# Altium PCB Tigershark 3D R1.8.PcbDoc (part 2 of 3)
Units mil, origin at the board's own origin, x right, y up, seen from the top; angles counter-clockwise.
Board outline 4755 x 4000 mil, 4 copper layers (Top Layer, Groun Plane, Power Plane, Bottom Layer), stack 61.73 mil thick; 343 components, 234 nets, 1061 pads, 540 vias.
Unrouted connection lines stored in the file: 312.
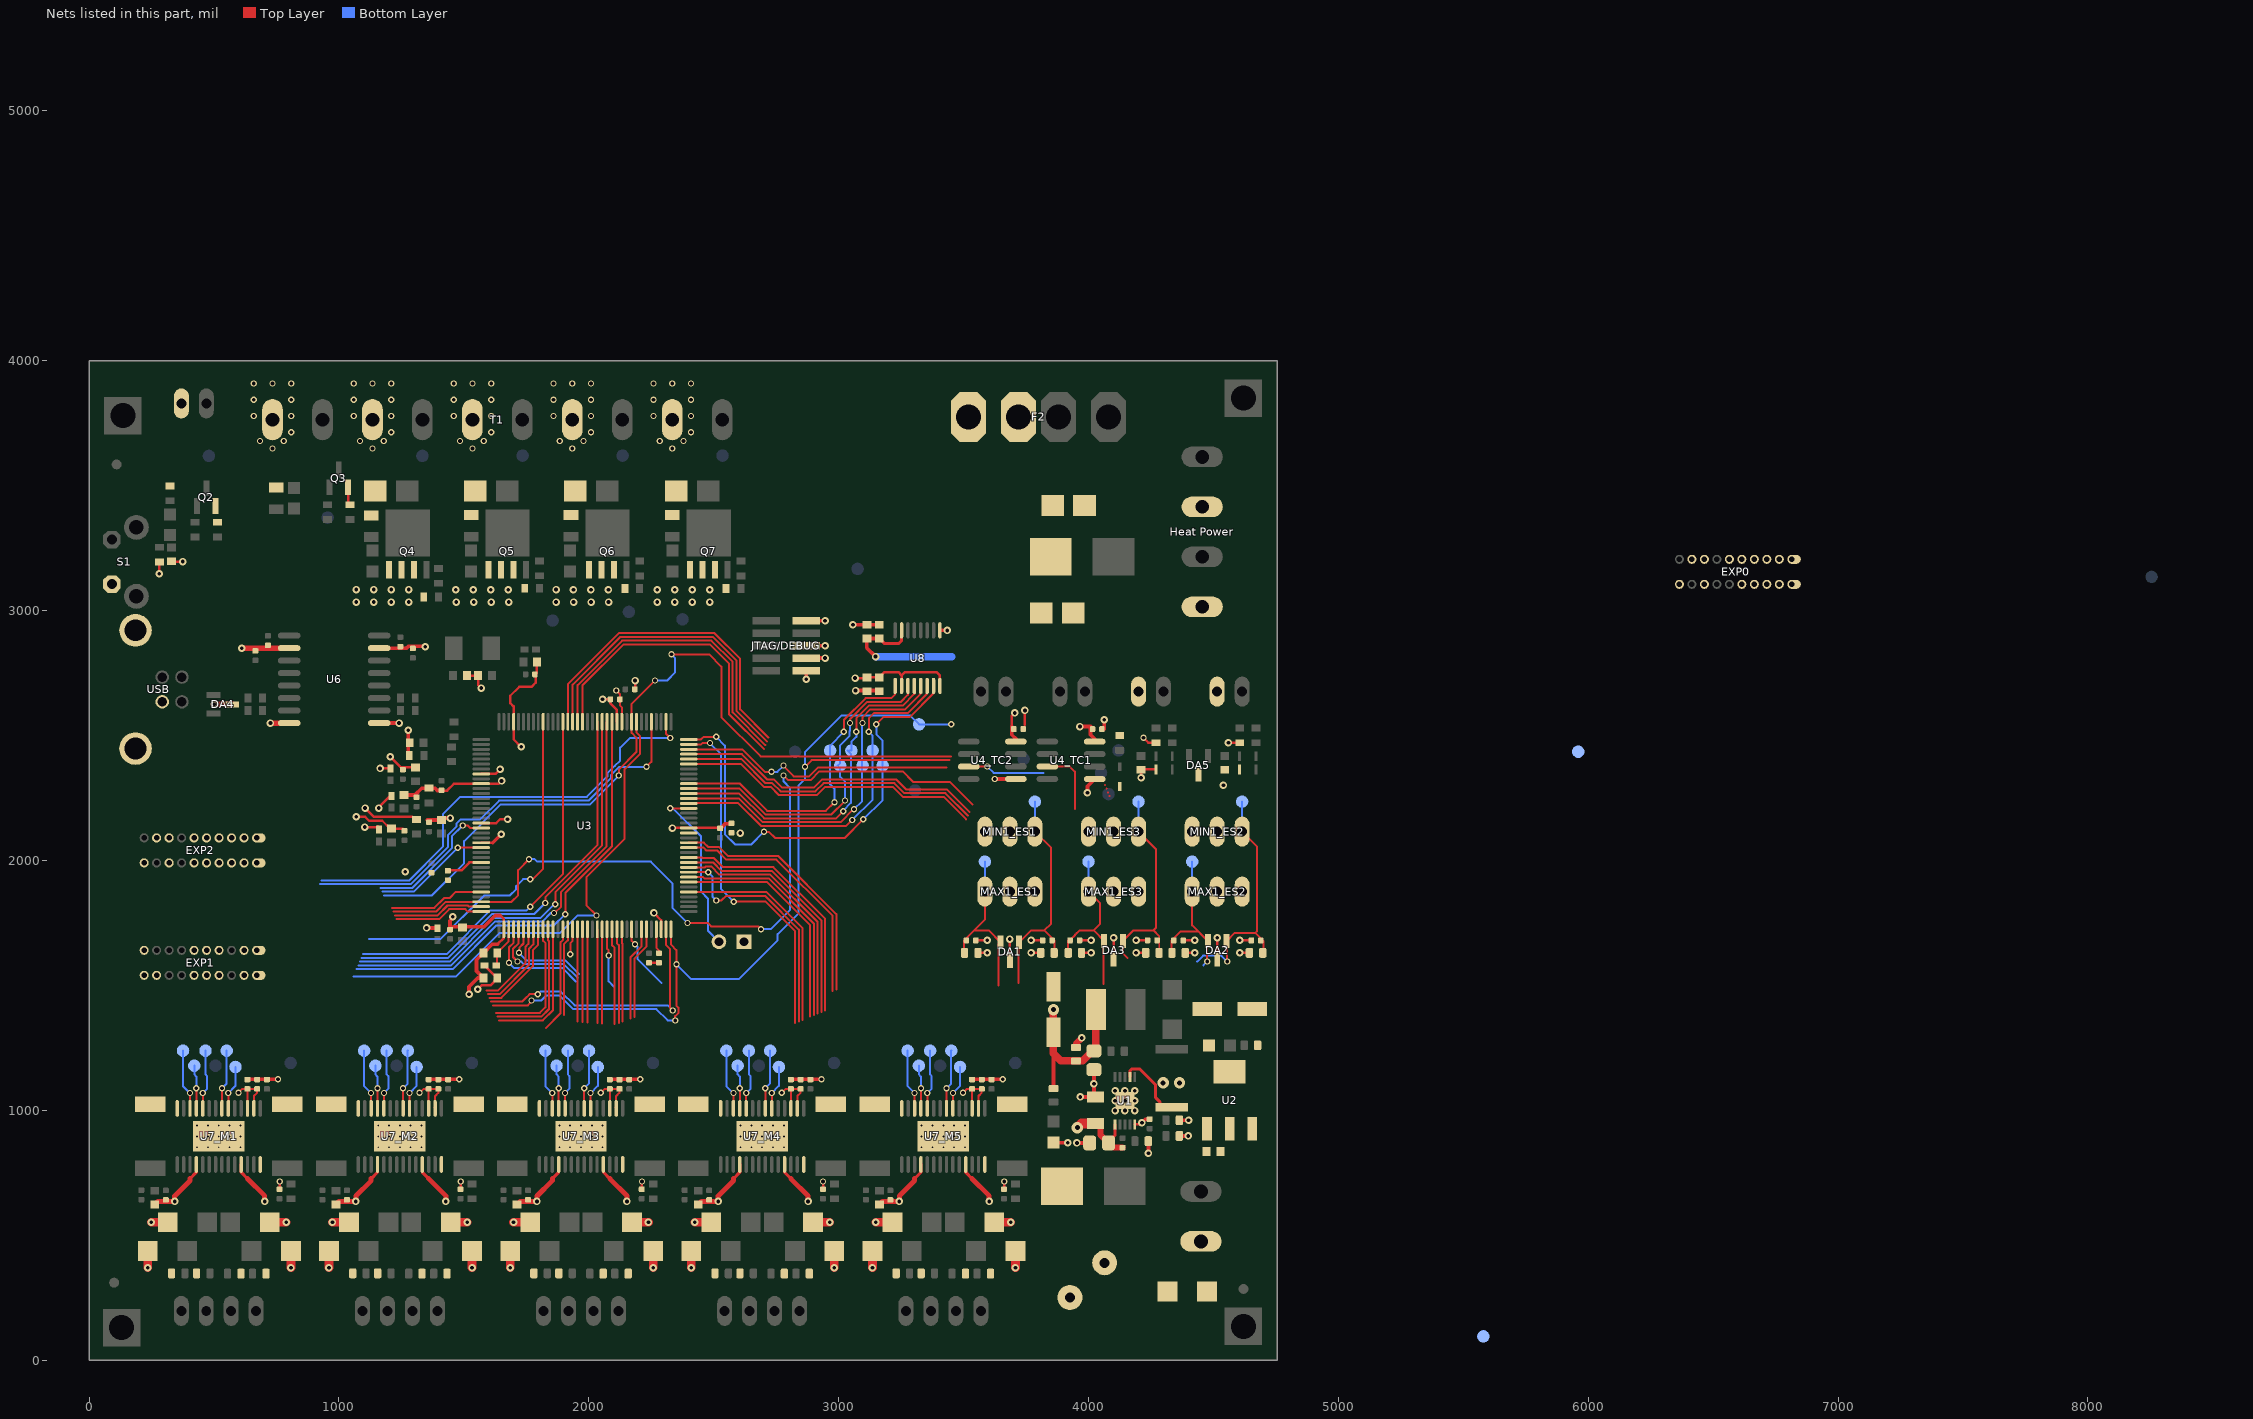
[diagram p4: the nets of this part, all layers, seen from the top]

## Footprints (in the part's own frame and the unit in brackets; to place one, negate y for a bottom-side part, rotate by r counter-clockwise, add the part's x,y. Pads: shape width x height; smd on the part's side, far side on the other; paste and mask are expansions set on the pad) (continued)
LQFP144_N [mm] "Thin QFP, 144-Leads, Body 20x20mm, Pitch 0.5mm, IPC Medium Density"
  oval 1.8x0.3 smd: 1(-10.55,8.75) 2(-10.55,8.25) 3(-10.55,7.75) 4(-10.55,7.25) 5(-10.55,6.75) 6(-10.55,6.25) 7(-10.55,5.75) 8(-10.55,5.25) 9(-10.55,4.75) 10(-10.55,4.25) 11(-10.55,3.75) 12(-10.55,3.25) 13(-10.55,2.75) 14(-10.55,2.25) 15(-10.55,1.75) 16(-10.55,1.25) 17(-10.55,0.75) 18(-10.55,0.25) 19(-10.55,-0.25) 20(-10.55,-0.75) 21(-10.55,-1.25) 22(-10.55,-1.75) 23(-10.55,-2.25) 24(-10.55,-2.75) 25(-10.55,-3.25) 26(-10.55,-3.75) 27(-10.55,-4.25) 28(-10.55,-4.75) 29(-10.55,-5.25) 30(-10.55,-5.75) 31(-10.55,-6.25) 32(-10.55,-6.75) 33(-10.55,-7.25) 34(-10.55,-7.75) 35(-10.55,-8.25) 36(-10.55,-8.75) 73(10.55,-8.75) 74(10.55,-8.25) 75(10.55,-7.75) 76(10.55,-7.25) 77(10.55,-6.75) 78(10.55,-6.25) 79(10.55,-5.75) 80(10.55,-5.25) 81(10.55,-4.75) 82(10.55,-4.25) 83(10.55,-3.75) 84(10.55,-3.25) 85(10.55,-2.75) 86(10.55,-2.25) 87(10.55,-1.75) 88(10.55,-1.25) 89(10.55,-0.75) 90(10.55,-0.25) 91(10.55,0.25) 92(10.55,0.75) 93(10.55,1.25) 94(10.55,1.75) 95(10.55,2.25) 96(10.55,2.75) 97(10.55,3.25) 98(10.55,3.75) 99(10.55,4.25) 100(10.55,4.75) 101(10.55,5.25) 102(10.55,5.75) 103(10.55,6.25) 104(10.55,6.75) 105(10.55,7.25) 106(10.55,7.75) 107(10.55,8.25) 108(10.55,8.75)
  oval 0.3x1.8 smd: 37(-8.75,-10.55) 38(-8.25,-10.55) 39(-7.75,-10.55) 40(-7.25,-10.55) 41(-6.75,-10.55) 42(-6.25,-10.55) 43(-5.75,-10.55) 44(-5.25,-10.55) 45(-4.75,-10.55) 46(-4.25,-10.55) 47(-3.75,-10.55) 48(-3.25,-10.55) 49(-2.75,-10.55) 50(-2.25,-10.55) 51(-1.75,-10.55) 52(-1.25,-10.55) 53(-0.75,-10.55) 54(-0.25,-10.55) 55(0.25,-10.55) 56(0.75,-10.55) 57(1.25,-10.55) 58(1.75,-10.55) 59(2.25,-10.55) 60(2.75,-10.55) 61(3.25,-10.55) 62(3.75,-10.55) 63(4.25,-10.55) 64(4.75,-10.55) 65(5.25,-10.55) 66(5.75,-10.55) 67(6.25,-10.55) 68(6.75,-10.55) 69(7.25,-10.55) 70(7.75,-10.55) 71(8.25,-10.55) 72(8.75,-10.55) 109(8.75,10.55) 110(8.25,10.55) 111(7.75,10.55) 112(7.25,10.55) 113(6.75,10.55) 114(6.25,10.55) 115(5.75,10.55) 116(5.25,10.55) 117(4.75,10.55) 118(4.25,10.55) 119(3.75,10.55) 120(3.25,10.55) 121(2.75,10.55) 122(2.25,10.55) 123(1.75,10.55) 124(1.25,10.55) 125(0.75,10.55) 126(0.25,10.55) 127(-0.25,10.55) 128(-0.75,10.55) 129(-1.25,10.55) 130(-1.75,10.55) 131(-2.25,10.55) 132(-2.75,10.55) 133(-3.25,10.55) 134(-3.75,10.55) 135(-4.25,10.55) 136(-4.75,10.55) 137(-5.25,10.55) 138(-5.75,10.55) 139(-6.25,10.55) 140(-6.75,10.55) 141(-7.25,10.55) 142(-7.75,10.55) 143(-8.25,10.55) 144(-8.75,10.55)
  silkscreen extent -10.67,-9.25 9.25,9.58, body extent -10,-10 10,10, height 1.6
MAXM-S8+4_N [mm] "SOIC, 8-Leads, Body 4.9x3.9mm, Pitch 1.27mm, IPC Medium Density"
  oval 2.2x0.6 smd: 1(-2.4,1.905) 2(-2.4,0.635) 3(-2.4,-0.635) 4(-2.4,-1.905) 5(2.4,-1.905) 6(2.4,-0.635) 7(2.4,0.635) 8(2.4,1.905)
  silkscreen extent -2.53,-2.5 0.9,2.88, body extent -2,-2.5 2,2.5, height 1.75
"MSTBV2 - duplicate" [mil]
  oval 82.5x165 hole 55: 1(-300,0) 2(-100,0)
  silkscreen extent -425,-150 25,180, body extent -425,-150 25,180, height 472
MSTBV4 [mil]
  oval 82.5x165 hole 55: 1(-300,0) 2(-100,0) 3(100,0) 4(300,0)
  silkscreen extent -425,-150 425,180, body extent -428,-153 428,183, height 472
MSTBV10 [mil]
  oval 82.5x165 hole 55: 1(-900,0) 2(-700,0) 3(-500,0) 4(-300,0) 5(-100,0) 6(100,0) 7(300,0) 8(500,0) 9(700,0) 10(900,0)
  silkscreen extent -1025,-150 1025,180, body extent -1028,-153 1025,183, height 472
OSHW_8X150_NOTEXT [mil]
  silkscreen extent 0,0 167,150, body extent 0,2 168,148
"Panasonic VS C" [mm]
  rect 3x1.4 smd: 1(5.348,2.921) 2(0.748,2.921)
  silkscreen extent 0.05,0.22 6.05,5.62, body extent 0.1,0.29 6,5.59, height 5.41
PN61729 [mil]
  round 54 hole 38: 1(50,186) 2(-49.21,186) 3(-49.21,107) 4(50,107)
  round 130.5 hole 87: 5(-236.22,0) 6(237,0)
  body extent -237,-405 238,226, height 406
PSMN7R0-60YS [mm] "TO, 5-Pads, Body 5.15x5.86mm (max), IPC Medium Density"
  rect 1.8x0.6 smd: 1(-2.6,1.905) 2(-2.6,0.635) 3(-2.6,-0.635) 4(-2.6,-1.905)
  rect 4.8x4.5 smd: 5(1.14,0)
  silkscreen extent -2.72,2.63 -2.48,2.88, body extent -1.85,-2.5 2.25,2.5, height 1.2
R0402 [mil]
  rrect40% 22x24 smd: 1(-18.9,0) 2(19,0)
  body extent -20,-10 20,10, height 14
R0603 [mm]
  rrect40% 0.74x1 smd: 1(-0.68,0) 2(0.68,0)
  body extent -0.8,-0.4 0.8,0.4, height 0.8
Resistor2512 [mm]
  rect 1.6x3.1 smd: 1(-3.25,0) 2(3.25,0)
  silkscreen extent -2.26,-1.3 2.26,1.3, body extent -3.24,-1.4 3.24,1.4, height 0.9
SK310A-TP [mm] "Molded Diode, 2-Leads, Body 4.31x2.69mm, IPC Medium Density"
  rect 2.3x2.15 smd: 1(-1.625,0) 2(1.625,0)
  silkscreen extent -2.3,-1.45 3.07,1.75, body extent -2.29,-1.42 2.28,1.42, height 2.95
"SM 0805 - gap trimmed" [mm]
  rect 1x1.5 smd: 1(-1.1,0) 2(1.1,0)
  silkscreen extent -0.36,-0.64 0.35,0.63
SMA-SM [mil]
  rect 79x79 smd: A(79,0) C(-78.74,0)
  silkscreen extent -89,-49 89,50, body extent -105,-54 105,55, height 116
SOT95P230X110-3N [mm] "SOT23, 3-Leads, Body 2.90x2.30mm, Pitch 0.95mm, IPC Medium Density"
  rect 1.4x0.6 smd: 1(-0.95,0.95) 2(-0.95,-0.95) 3(0.95,0)
  silkscreen extent -1.07,-1.5 0.7,1.93, body extent -0.7,-1.5 0.7,1.5, height 1.1
SOT230P700X190-4N [mm] "SOT223, 4-Leads, Body 6.50x7.00mm (avg), Pitch 2.30mm, IPC Medium Density"
  rect 2.4x1 smd: 1(-2.9,2.3) 2(-2.9,0) 3(-2.9,-2.3)
  rect 2.4x3.25 smd: 4(2.9,0)
  silkscreen extent -3.02,-3.35 1.4,3.47, body extent -1.85,-3.35 1.85,3.35, height 1.9
SZMM3Z4V7T1G [mm] "Molded Diode, 2-Leads, Body 1.70x1.25mm, IPC Medium Density"
  rect 0.9x0.35 smd: 1(-1,0) 2(1,0)
  silkscreen extent -0.95,-0.7 1.4,0.7, body extent -0.9,-0.67 0.9,0.67, height 1
TP-2#1 [mil]
  round 50 smd far side: 1(0,0)
TP-2#2 [mil]
  round 50 smd: 1(0,0)
TSOP65P640X120-16N [mm] "TSOP, 16-Leads, Body 5.00x4.40mm, Pitch 0.65mm, IPC Medium Density"
  oval 1.65x0.35 smd: 1(-2.825,2.275) 2(-2.825,1.625) 3(-2.825,0.975) 4(-2.825,0.325) 5(-2.825,-0.325) 6(-2.825,-0.975) 7(-2.825,-1.625) 8(-2.825,-2.275) 9(2.825,-2.275) 10(2.825,-1.625) 11(2.825,-0.975) 12(2.825,-0.325) 13(2.825,0.325) 14(2.825,0.975) 15(2.825,1.625) 16(2.825,2.275)
  silkscreen extent -2.95,-2.55 1.6,3.12, body extent -2.25,-2.55 2.25,2.55, height 1.2
VSSOP10 [mm] "TSSOP, 10-Leads, Body 3.15x3.00mm, Pitch 0.50mm, Thermal Pad 2.05.2x1.50.2mm, IPC High Density"
  rect 1.02x0.3 smd mask+0.102: 1(-2.4,1) 2(-2.4,0.5) 3(-2.4,0) 4(-2.4,-0.5) 5(-2.4,-1) 6(2.4,-1) 7(2.4,-0.5) 8(2.4,0) 9(2.4,0.5) 10(2.4,1)
  rect 1.73x1.9 smd: 11(0,0)
  silkscreen extent -2.02,-1.7 0.65,1.82, body extent -1.55,-1.7 1.55,1.7, height 1.09
XAL50xx-153 [mm] "Precision Wire Wound Inductor, 2-Leads, Body 5.28x5.48mm, IPC High Density"
  rect 2.05x4.2 smd: 1(-2,0) 2(2,0)
  silkscreen extent -2.75,-2.85 2.75,2.85, body extent -2.74,-2.84 2.74,2.84, height 4.25

## Part data
C1_ES1 C1_ES2 C1_ES3 C2_ES1 C2_ES2 C2_ES3 C71_M1 C71_M2 C71_M3 C71_M4 C71_M5: library part GRM155R60J474KE19D, "0.47uF 6.3v C0402 - GRM155R60J474KE19D"
C3_M1 C3_M2 C3_M3 C3_M4 C3_M5 C5_M1 C5_M2 C5_M3 C5_M4 C5_M5 C6_M1 C6_M2 C6_M3 C6_M4 C6_M5 C8_M1 C8_M2 C8_M3 C8_M4 C8_M5: library part CC0603ZRY5V6BB105, "CAP CER 0603 1uF 10V Y5V"
C4 C13 C17 C20 C25 C26 C28 C32 C36 C43 C44 C55 C60 C64 C65 C66_M1 C66_M2 C66_M3 C66_M4 C66_M5 C73: library part "Cap Semi", "Capacitor (Semiconductor SIM Model)"
C7: library part UPW1H471MHD1TO, "CAP ALU 470uF 50V 20%"
C9: library part C1206C475K5PACTU, "CAP CER 1206 4.7uF 50V 10% X5R"
C10: library part GRM21BR71H105KA12L, "CAP CER 0805 1uF 50V 10% X7R"
C11 C40: library part C0603C104K5RACTU, "CAP CER 0603 100nF 50V 10% X7R"
C12_M1 C12_M2 C12_M3 C12_M4 C12_M5 C14_M1 C14_M2 C14_M3 C14_M4 C14_M5 C23 C27 C31_TC1 C31_TC2 C33 C37 C38 C39 C41 C42 C45 C46 C47 C48 C53 C54 C56 C57 C58 C59 C61 C75_M1 C75_M2 C75_M3 C75_M4 C75_M5: library part "100nF C0402 - GRM155R71C104KA88D", "Capacitor (Semiconductor SIM Model)"
C21: library part C0805C106K8PACTU, "CAP CER 0805 10uF 10V 10% X5R"
C22: library part GRM155R60J105KE19D, "CAP CER 0402 1uF 6.3V 10% X5R"
C24 C29: library part "Cap Pol3", "Polarized Capacitor (Surface Mount)"
C30_TR1 C30_TR2 C63: "Capacitor (Semiconductor SIM Model)"
C68_M1 C68_M2 C68_M3 C68_M4 C68_M5: library part GRM155R71H103JA88D, "CAP CER 10000PF 50V X7R 0402"
D1: library part "D Zener", "Zener Diode"
D2: library part SK310A, "DIODE Schottky 3A SMA"
D3_TR1 D3_TR2 D5_TR1 D5_TR2: "High Conductance Fast Diode"
D4 D6 D12 D15 D17 D19: library part "D Schottky", "Schottky Diode"
D7 D9: "LED 0805 Red"
D8 D20_M1 D20_M2 D20_M3 D20_M4 D20_M5 D21_M1 D21_M2 D21_M3 D21_M4 D21_M5 D22_M1 D22_M2 D22_M3 D22_M4 D22_M5 D23_M1 D23_M2 D23_M3 D23_M4 D23_M5: "DIODE TVS 30V SMA"
D10 D11 D13 D14 D16 D18: "LED 0805 Yellow"
DA1 DA2 DA3 DA4 DA5: "PESDxL2BT TVS Diode Array 2x"
F1 F3: "0154005.DR LittleFuse"
F2: library part "Fuse 1", "Fuse"
"Heat Power": library part con-phoenix-508_4
JTAG/DEBUG: library part "ARM Cortex JTAG-DEBUG Header"
L1: "IND 15uH 3.9A 20%"
M1_M1 M1_M2 M1_M3 M1_M4 M1_M5: library part "Molex 0705430003 Alt", "Molex 4 Pin Clip Connector"
MAX1_ES1 MAX1_ES2 MAX1_ES3 MIN1_ES1 MIN1_ES2 MIN1_ES3: library part "Molex Endstop"
"Motor Power": library part con-phoenix-508_2
P1: library part "Header 2", "Header, 2-Pin"
Q2 Q3 Q4 Q5 Q6 Q7: "N-Channel MOSFET"
R1 R14_TR1 R14_TR2 R19_TR1 R19_TR2 R21: "Resistor"
R2_ES1 R2_ES2 R2_ES3 R3_ES1 R3_ES2 R3_ES3: library part ERJ3EKF4701V, "RES 0603 4.7K 100mW 1%"
R4 R5 R6 R13 R15 R16 R18 R20 R22 R23 R31_M1 R31_M2 R31_M3 R31_M4 R31_M5 R32_M1 R32_M2 R32_M3 R32_M4 R32_M5 R33_M1 R33_M2 R33_M3 R33_M4 R33_M5 R45 R46 R47 R52 R55 R56 R58 R59 R60 R62 R63 R64 R66 R67 R68 R70 R71: library part Res3, "Resistor"
R7 R10 R12: library part ERJ-3EKF1002V, "RES 0603 10K 100mW 1%"
R8 R11: library part ERJ-3EKF1001V, "RES 0603 1K 100mW 1%"
R9: library part RL2512FK-070R06L, "RES 0.06 OHM 1W 1% 2512 SMD"
R17: library part CRCW0402200KFKED, "RES 0402 22r 63mW 1%"
R30_M1 R30_M2 R30_M3 R30_M4 R30_M5: library part ERJ2GEJ105X, "RES 0402 1M 100mW 5%"
S1: library part 1571610-2_1, "SWTCH Momentary Washable"
T1: library part "0395311010 - Molex 10 Position Connector", "MSBTV10 10 port connector same as RAMBo"
TP1 TP2 TP3 TP4 TP5 TP6 TP7 TP8 TP9_ES1 TP9_ES2 TP9_ES3 TP10_ES1 TP10_ES2 TP10_ES3 TP11 TP12 TP13 TP14 TP32_M1 TP32_M2 TP32_M3 TP32_M4 TP32_M5 TP33_M1 TP33_M2 TP33_M3 TP33_M4 TP33_M5 TP35_M1 TP35_M2 TP35_M3 TP35_M4 TP35_M5 TP36_M1 TP36_M2 TP36_M3 TP36_M4 TP36_M5 TP37_M1 TP37_M2 TP37_M3 TP37_M4 TP37_M5 TP38 TP39_M1 TP39_M2 TP39_M3 TP39_M4 TP39_M5 TP40_M1 TP40_M2 TP40_M3 TP40_M4 TP40_M5 TP41 TP42 TP43 TP44 TP45 TP46 TP47 TP48 TP49 TP50 TP51 TP52_TR1 TP52_TR2: library part Socket, "Socket"
U1: library part LM25011, "REG BUCK"
U4_TC1 U4_TC2: "Cold Junction Compensated Thermocouple to Digital Converter, 14 Bits Temperature Resolution, -40 to 125 degC, 8-Pin SOIC (S8+4), Pb-Free"
U6: "USB Opto Isolator"
U7_M1 U7_M2 U7_M3 U7_M4 U7_M5: "DRV8825 Ti Stepper Driver"
U8: library part TXB0106, "TXB0106 - Bidriectional Opendrain/pushpull level shift"
X2: library part XTAL, "Crystal Oscillator"

## Free pads (board coordinates)
  rect 150x150 hole 100: ""(130,130) ""(135,3780) ""(4620,135) ""(4620,3850)

## Via types
v1: diameter 30, hole 15, Top Layer to Bottom Layer, tented both sides, 229 vias
v2: diameter 25, hole 15, Top Layer to Bottom Layer, tented both sides, 173 vias
v3: diameter 19.68, hole 7.87, Top Layer to Bottom Layer, 75 vias
v4: diameter 25, hole 15, Top Layer to Bottom Layer, 50 vias
v5: diameter 30, hole 15, Top Layer to Bottom Layer, 9 vias
v6: diameter 45, hole 20, Top Layer to Bottom Layer, tented both sides, 4 vias

## Nets (pads, with @x,y where several pads share a name; then routed paths per layer and width w, separated by ;. In a path a pad name is that pad's centre, name@x,y a point inside that pad or via, vN(x,y) a via of type N, cw(c..) or ccw(c..) an arc to the next point about the centre after c; other vN are vias at no path point)
3.3VCC: C12_M1.2 C12_M2.2 C12_M3.2 C12_M4.2 C12_M5.2 C14_M1.2 C14_M2.2 C14_M3.2 C14_M4.2 C14_M5.2 C25.2 C26.1 C29.1 C31_TC1.2 C31_TC2.2 C45.2 C46.2 C47.2 C48.2 C64.2 DA5.3 EXP0.12 EXP1.12 EXP2.12 FB5.1 FB6.1 FB7.1 FB8.1 FB9.1 JTAG/DEBUG.1 MAX1_ES1.3 MAX1_ES2.3 MAX1_ES3.3 MIN1_ES1.3 MIN1_ES2.3 MIN1_ES3.3 P1.1 R2_ES1.2 R2_ES2.2 R2_ES3.2 R3_ES1.2 R3_ES2.2 R3_ES3.2 R6.1 R11.2 R19_TR1.2 R19_TR2.2 R21.2 TP3.1 U2.3 U3.11 U3.62 U3.105 U3.125 U4_TC1.4 U4_TC2.4 U7_M1.16 U7_M1.17 U7_M2.16 U7_M2.17 U7_M3.16 U7_M3.17 U7_M4.16 U7_M4.17 U7_M5.16 U7_M5.17 U8.2 U8.8 | length 3269.1
  Top Layer w8: v4(597.48,1070) 613.48,1086 C12_M1.2@632.48,1086 ; U7_M1.17@633.9,1008.46 633.9,1084.58 C12_M1.2@632.48,1086 ; U7_M1.16@657.48,1010.47 659.49,1008.46 659.49,1057.01 672.48,1070 C14_M1.2@672.48,1085 ; C14_M1.2@672.48,1086 C12_M1.2@632.48,1086 ; v4(1322.48,1070) 1338.48,1086 C12_M2.2@1357.48,1086 ; U7_M2.17@1358.9,1008.46 1358.9,1084.58 C12_M2.2@1357.48,1086 ; U7_M2.16@1382.48,1010.47 1384.49,1008.46 1384.49,1057.01 1397.48,1070 C14_M2.2@1397.48,1085 ; C14_M2.2@1397.48,1086 C12_M2.2@1357.48,1086 ; FB9.1@1582.01,1579.65 FB9.1@1583.19,1579.65 ; C64.2@1633.19,1527.2 C64.2@1633.19,1529.65 ; v4(2047.48,1070) 2063.48,1086 C12_M3.2@2082.48,1086 ; U7_M3.17@2083.9,1008.46 2083.9,1084.58 C12_M3.2@2082.48,1086 ; U7_M3.16@2107.48,1010.47 2109.49,1008.46 2109.49,1057.01 2122.48,1070 C14_M3.2@2122.48,1085 ; v2(2110,2680) 2124,2666 C47.2@2124,2645 2124,2621 2132.17,2612.83 U3.11@2132.17,2555 ; C14_M3.2@2122.48,1086 C12_M3.2@2082.48,1086 ; U3.105@2269.96,1724.29 2269.96,1650.32 2280.63,1639.65 C45.2@2280.63,1628.65 ; v4(2772.48,1070) 2788.48,1086 C12_M4.2@2807.48,1086 ; U7_M4.17@2808.9,1008.46 2808.9,1084.58 C12_M4.2@2807.48,1086 ; U7_M4.16@2832.48,1010.47 2834.49,1008.46 2834.49,1057.01 2847.48,1070 C14_M4.2@2847.48,1085 ; C14_M4.2@2847.48,1086 C12_M4.2@2807.48,1086 ; JTAG/DEBUG.1@2870.55,2759.65 JTAG/DEBUG.1@2870.63,2759.57 ; v4(3497.48,1070) 3513.48,1086 C12_M5.2@3532.48,1086 ; U7_M5.17@3533.9,1008.46 3533.9,1084.58 C12_M5.2@3532.48,1086 ; U7_M5.16@3557.48,1010.47 3559.49,1008.46 3559.49,1057.01 3572.48,1070 C14_M5.2@3572.48,1085 ; C14_M5.2@3572.48,1086 C12_M5.2@3532.48,1086
  Top Layer w10: v1(281,3147) R21.2@281,3194.47 ; v1(1103.53,2133.27) 1155.75,2133.27 FB5.1@1155.75,2137.45 ; v1(1104.53,2209.65) 1138.53,2175.65 1293.05,2175.65 R6.1@1304.53,2164.17 ; v1(1159.53,2209.65) 1159.53,2213.27 FB7.1@1204.53,2258.27 ; v1(1164.53,2368.27) FB8.1@1204.53,2368.27 ; C48.2@1435.63,1959.65 1489.67,1959.65 1522.03,1992.01 U3.62@1569.17,1992.01 ; v1(1555.63,1484.65) 1570.63,1499.65 1605.63,1499.65 C64.2@1633.19,1527.2 ; FB9.1@1583.19,1579.65 C64.2@1633.19,1529.65 ; v1(3065.63,2729.65) C25.2@3103.07,2729.65 ; C25.2@3112.63,2732.2 C26.1@3162.63,2732.2 3184.07,2753.65 3238.63,2753.65 3251.65,2740.62 ; U8.2@3251.65,2698.43 3251.65,2740.62 ; U8.8@3405.2,2698.43 3405.2,2740.08 3391.63,2753.65 3264.68,2753.65 3251.65,2740.62 ; 3560,1630 v1(3595,1630) ; 3692.95,2540.47 3692.95,2578.43 v1(3705,2590.47) ; v1(3770,1630) 3805.95,1630 ; 3975,1630 v1(4010,1630) ; v1(4190,1630) 4225.94,1630 ; v2(4220,2490.47) 4239.53,2470.94 R19_TR2.2@4270,2470.94 ; 4390,1630 v1(4425,1630) ; v1(4560,2470.47) 4604.53,2470.47 R19_TR1.2@4605,2470.94 ; v1(4605,1630) 4640.95,1630
  Top Layer w15: v1(1350.63,1729.65) 1393.15,1729.65 FB6.1@1394.53,1728.27 ; v1(2870.63,2724.65) JTAG/DEBUG.1@2870.63,2759.57 ; C31_TC2.2@3692.95,2535.47 3692.95,2503.03 3709.49,2486.5 U4_TC2.4@3709.49,2475.47 ; v1(3965.51,2535.47) 4007.95,2535.47 4007.95,2503.03 4024.49,2486.5 U4_TC1.4@4024.49,2475.47
  other v1: 1265.63,1954.65 2605.63,2109.65
+5VCC: C4.2 C11.1 C17.1 C20.1 C21.1 C24.1 EXP0.9 EXP1.9 EXP2.9 L1.2 R7.2 R8.2 R10.1 TP1.1 U2.1 U8.15 | length 1333.7
  Top Layer w12: C17.1@3162.63,2888.09 3182.07,2868.65 3241.63,2868.65 3251.65,2878.67 U8.15@3251.65,2920.87
  Top Layer w15: v1(3147.63,2815.65) 3112.63,2850.65 C20.1@3112.63,2888.09 C17.1@3162.63,2888.09 ; 3859.57,1227.31 3859.57,1087.2 R8.2@3860,1086.77 ; R7.2@4239.35,876.32 4239.57,876.09 v1(4239.57,828.31) ; R10.1@4363.34,960.31 v1(4400.57,960.31)
  Top Layer w30: v6(3859.57,1402.31) C24.1@3859.57,1312.76 3859.57,1227.31 3889.35,1197.54 C11.1@3949.57,1197.54 3977.31,1197.54 4017.48,1237.72 C21.1@4021.57,1237.72 ; C21.1@4029.83,1245.98 L1.2@4029.83,1403.31
  Bottom Layer w30: v1(3147.63,2815.65) 3451.63,2815.65
+12VCC1: C7.1 C9.1 C10.1 C66_M1.1 C66_M2.1 C66_M3.1 C66_M4.1 C66_M5.1 D8.C F3.2 R17.2 R30_M1.2 R30_M2.2 R30_M3.2 R30_M4.2 R30_M5.2 U1.1 U7_M1.4 U7_M1.11 U7_M2.4 U7_M2.11 U7_M3.4 U7_M3.11 U7_M4.4 U7_M4.11 U7_M5.4 U7_M5.11 | length 2536.6
  Top Layer w12: 403.74,726.26 429.17,751.69 U7_M1.4@429.17,784.06 ; U7_M1.11@608.31,784.06 608.31,751.69 633.74,726.26 ; 1128.74,726.26 1154.17,751.69 U7_M2.4@1154.17,784.06 ; U7_M2.11@1333.31,784.06 1333.31,751.69 1358.74,726.26 ; 1853.74,726.26 1879.17,751.69 U7_M3.4@1879.17,784.06 ; U7_M3.11@2058.31,784.06 2058.31,751.69 2083.74,726.26 ; 2578.74,726.26 2604.17,751.69 U7_M4.4@2604.17,784.06 ; U7_M4.11@2783.31,784.06 2783.31,751.69 2808.74,726.26 ; 3303.74,726.26 3329.17,751.69 U7_M5.4@3329.17,784.06 ; U7_M5.11@3508.31,784.06 3508.31,751.69 3533.74,726.26 ; C10.1@4097.05,890.68 4106.2,899.83 U1.1@4106.2,943.83
  Top Layer w20: C66_M1.1@262.48,622.44 275.04,635 v1(342.48,635) 342.48,656.62 403.74,717.88 403.74,726.26 ; 633.74,726.26 702.48,657.52 v1(702.48,635) ; C66_M2.1@987.48,622.44 1000.04,635 v1(1067.48,635) 1067.48,656.62 1128.74,717.88 1128.74,726.26 ; 1358.74,726.26 1427.48,657.52 v1(1427.48,635) ; C66_M3.1@1712.48,622.44 1725.04,635 v1(1792.48,635) 1792.48,656.62 1853.74,717.88 1853.74,726.26 ; 2083.74,726.26 2152.48,657.52 v1(2152.48,635) ; C66_M4.1@2437.48,622.44 2450.04,635 v1(2517.48,635) 2517.48,656.62 2578.74,717.88 2578.74,726.26 ; 2808.74,726.26 2877.48,657.52 v1(2877.48,635) ; C66_M5.1@3162.48,622.44 3175.04,635 v1(3242.48,635) 3242.48,656.62 3303.74,717.88 3303.74,726.26 ; 3533.74,726.26 3602.48,657.52 v1(3602.48,635)
  Top Layer w24: C9.1@4047.57,927.15 4047.57,901.72 C10.1@4079.98,869.31 ; C10.1@4098.98,850.31 R17.2@4136.57,850.31
  Top Layer w40: v6(3955,930) 3972.17,947.17 C9.1@4027.57,947.17
+12VCC2: D6.2 D12.2 D15.2 D17.2 F1.2 FAN-1.1 R1.2 R13.1 R47.1 R56.2 R60.2 R64.2 T1.1 T1.3 T1.5 T1.7
  other v2: 734,3649 1134,3649 1534,3649 1934,3649 684,3679 779,3679 1084,3679 1179,3679 1484,3679 1579,3679 1884,3679 1979,3679 809,3714 1209,3714 1609,3714 2009,3714 659,3779 809,3779 1059,3779 1209,3779 1459,3779 1609,3779 1859,3779 2009,3779 659,3844 809,3844 1059,3844 1209,3844 1459,3844 1609,3844 1859,3844 2009,3844 659,3909 734,3909 809,3909 1059,3909 1134,3909 1209,3909 1459,3909 1534,3909 1609,3909 1859,3909 1934,3909 2009,3909
+12VCC3: D4.2 D19.2 F2.2 R68.2 T1.9
  other v2: 2334,3649 2284,3679 2379,3679 2409,3714 2259,3779 2409,3779 2259,3844 2409,3844 2259,3909 2334,3909 2409,3909
AN_EXP0: EXP1.7 U3.14 | length 1725.7
  Top Layer w8: v2(1860.63,1789.65) 1863.86,1789.65 1889.13,1814.91 1889.13,1874.36 2071.63,2056.86 2071.63,2553.52 U3.14@2073.11,2555
  Bottom Layer w8: 1077.14,1579.65 1449.12,1579.65 1624.12,1754.65 1813.61,1754.65 1848.61,1789.65 v2(1860.63,1789.65)
AN_EXP1: EXP1.14 U3.15 | length 1685.7
  Top Layer w8: v2(1865.63,1824.65) 1865.63,1872.07 2053.43,2059.87 U3.15@2053.43,2555
  Bottom Layer w8: 1083.35,1594.65 1442.91,1594.65 1617.91,1769.65 1807.4,1769.65 1862.4,1824.65 v2(1865.63,1824.65)
AVREF: C65.2 FB9.2 U3.75 | length 165.4
  Top Layer w8: FB9.2@1629.25,1579.65 1633.19,1583.58 C65.2@1633.19,1629.65 1679.41,1675.87 U3.75@1679.41,1724.29
BED_PWM: TP38.1 U3.144 U8.7 | length 1884.6
  Top Layer w8: U3.144@2399.88,2484.13 2449.02,2484.13 2459.53,2494.65 v2(2509.53,2494.65) ; v2(2700.63,2114.65) 2720.63,2114.65 2745.63,2089.65 3023.77,2089.65 v2(3098.41,2164.29) ; v2(3150.63,2544.65) 3180.63,2574.65 3285.63,2574.65 3379.61,2668.62 U8.7@3379.61,2698.43
  Bottom Layer w8: v2(2509.53,2494.65) 2544.53,2459.65 2544.53,2104.65 2585.53,2063.65 2649.63,2063.65 v2(2700.63,2114.65) ; v2(3098.41,2164.29) 3175.63,2241.51 3175.63,2479.65 3150.63,2504.65 v2(3150.63,2544.65)
DIR1: TP39_M1.1 U3.87 U7_M1.20 | length 525.5
  Top Layer w8: U7_M1.20@557.13,1008.46 v4(557.13,1068.9) ; 1901.57,1381.29 1901.57,1665.59 1915.63,1679.65 U3.87@1915.63,1724.29
  Bottom Layer w8: v4(557.13,1068.9) 585.74,1097.51 TP39_M1.1@585.74,1173.26
DIR2: TP39_M2.1 U3.94 U7_M2.20 | length 553.5
  Top Layer w8: U7_M2.20@1282.13,1008.46 v4(1282.13,1068.9) ; 2053.43,1347.44 U3.94@2053.43,1724.29
  Bottom Layer w8: v4(1282.13,1068.9) 1310.74,1097.51 TP39_M2.1@1310.74,1173.26
DIR3: TP39_M3.1 U3.103 U7_M3.20 | length 547.7
  Top Layer w8: U7_M3.20@2007.13,1008.46 v4(2007.13,1068.9) ; 2181.85,1373.43 2181.85,1605.87 2230.59,1654.61 U3.103@2230.59,1724.29
  Bottom Layer w8: v4(2007.13,1068.9) 2035.74,1097.51 TP39_M3.1@2035.74,1173.26
DIR4: TP39_M4.1 U3.116 U7_M4.20 | length 1120.9
  Top Layer w8: U3.116@2399.88,1932.95 2457.32,1932.95 2462.01,1928.27 2719.73,1928.27 2900.63,1747.37 2900.63,1380.71 ; U7_M4.20@2732.13,1008.46 v4(2732.13,1068.9)
  Bottom Layer w8: v4(2732.13,1068.9) 2760.74,1097.51 TP39_M4.1@2760.74,1173.26
DIR5: TP39_M5.1 U3.123 U7_M5.20 | length 1187.6
  Top Layer w8: U3.123@2399.88,2070.75 2460.74,2070.75 2476.84,2054.65 2520.47,2054.65 2556.84,2018.27 2757.01,2018.27 2990.63,1784.65 2990.63,1482.99 ; U7_M5.20@3457.13,1008.46 v4(3457.13,1068.9)
  Bottom Layer w8: v4(3457.13,1068.9) 3485.74,1097.51 TP39_M5.1@3485.74,1173.26
DIR_EXP1: EXP1.6 U3.13 | length 1773.7
  Top Layer w8: v2(1905.63,1784.65) 1905.63,1869.65 2092.8,2056.81 U3.13@2092.8,2555
  Bottom Layer w8: 1070.92,1564.65 1455.34,1564.65 1630.34,1739.65 1860.63,1739.65 v2(1905.63,1784.65)
DIR_EXP2: EXP1.15 U3.16 | length 1638.7
  Top Layer w8: v2(1825.63,1829.65) 1825.63,1853.29 2033.74,2061.4 U3.16@2033.74,2555
  Bottom Layer w8: 1089.56,1609.65 1436.7,1609.65 1611.7,1784.65 1780.63,1784.65 v2(1825.63,1829.65)
EN1: TP32_M1.1 U3.86 U7_M1.21 | length 660.8
  Top Layer w8: U7_M1.21@531.54,1008.46 v4(531.54,1088.31) ; 1828.72,1329.65 1886.57,1387.5 1886.57,1671.8 1895.94,1681.17 U3.86@1895.94,1724.29
  Bottom Layer w8: v4(531.54,1088.31) 549.74,1106.51 549.74,1238.26 TP32_M1.1@550.74,1238.26
EN2: TP32_M2.1 U3.93 U7_M2.21 | length 613.7
  Top Layer w8: U7_M2.21@1256.54,1008.46 v4(1256.54,1088.31) ; 2033.74,1348.97 U3.93@2033.74,1724.29
  Bottom Layer w8: v4(1256.54,1088.31) 1274.74,1106.51 1274.74,1238.26 TP32_M2.1@1275.74,1238.26
EN3: TP32_M3.1 U3.102 U7_M3.21 | length 613.7
  Top Layer w8: U7_M3.21@1981.54,1008.46 v4(1981.54,1088.31) ; 2166.85,1367.21 2166.85,1612.08 2210.91,1656.13 U3.102@2210.91,1724.29
  Bottom Layer w8: v4(1981.54,1088.31) 1999.74,1106.51 1999.74,1238.26 TP32_M3.1@2000.74,1238.26
EN4: TP32_M4.1 U3.115 U7_M4.21 | length 1162
  Top Layer w8: U3.115@2399.88,1913.27 2713.52,1913.27 2885.63,1741.15 2885.63,1374.5 ; U7_M4.21@2706.54,1008.46 v4(2706.54,1088.31)
  Bottom Layer w8: v4(2706.54,1088.31) 2724.74,1106.51 2724.74,1238.26 TP32_M4.1@2725.74,1238.26
EN5: TP32_M5.1 U3.122 U7_M5.21 | length 1228.7
  Top Layer w8: U3.122@2399.88,2051.06 2459.21,2051.06 2470.63,2039.65 2514.25,2039.65 2550.63,2003.27 2750.79,2003.27 2975.63,1778.43 2975.63,1476.78 ; U7_M5.21@3431.54,1008.46 v4(3431.54,1088.31)
  Bottom Layer w8: v4(3431.54,1088.31) 3449.74,1106.51 3449.74,1238.26 TP32_M5.1@3450.74,1238.26
EN_EXP1: EXP1.5 U3.8 | length 1960
  Top Layer w8: v2(2030.63,1779.65) 1991.24,1819.04 1991.24,1934.04 2143.38,2086.19 2143.38,2365.58 2205.53,2427.73 2205.53,2497.32 2191.22,2511.63 U3.8@2191.22,2555
  Bottom Layer w8: 1058.5,1534.65 1467.76,1534.65 1642.76,1709.65 1885.08,1709.65 1955.08,1779.65 v2(2030.63,1779.65)
EN_EXP2: EXP1.16 U3.23 | length 1542.9
  Top Layer w8: v2(1765.63,1814.65) 1895.94,1944.96 U3.23@1895.94,2555
  Bottom Layer w8: 1095.78,1624.65 1430.48,1624.65 1605.48,1799.65 1750.63,1799.65 v2(1765.63,1814.65)
ERASE: P1.2 U3.130 | length 695.4
  Top Layer w8: v2(2325.63,2208.54) U3.130@2399.88,2208.54
  Bottom Layer w8: v2(2325.63,2208.54) 2336.73,2208.54 2449.53,2095.75 2449.53,1874.65 2477.03,1847.15 2477.03,1718.25 P1.2@2520.63,1674.65
EXP_CS: EXP0.1 U3.142 | length 1113.4
  Top Layer w8: U3.142@2399.88,2444.76 2614.3,2444.76 2704.42,2354.65 v2(2730.63,2354.65) ; v2(2779.53,2379.65) 2779.53,2376.41 2819.79,2336.15 2881.58,2336.15 2916.58,2371.15 3431.18,2371.15
  Bottom Layer w8: v2(2730.63,2354.65) 2754.53,2354.65 v2(2779.53,2379.65)
EXP_CS2: EXP2.1 U3.55 | length 538.9
  Top Layer w8: v2(1495.63,2139.65) 1515.63,2139.65 1525.47,2129.8 U3.55@1569.17,2129.8
  Bottom Layer w8: 1165.63,1889.65 1293,1889.65 1452.13,2048.78 1452.13,2096.15 v2(1495.63,2139.65)
EXP_INTERRUP1: EXP0.16 U3.19 | length 1231.2
  Top Layer w8: U3.19@1974.68,2555 1974.68,2700.21 2139.12,2864.65 2484.27,2864.65 2560.63,2788.29 2560.63,2586.01 2700.49,2446.15 ; 4083.84,2257.66 4084.07,2257.66
EXP_INTERRUP2: EXP0.15 U3.20 | length 1264.2
  Top Layer w8: U3.20@1955,2555 1955,2701.74 2132.91,2879.65 2490.48,2879.65 2575.63,2794.5 2575.63,2592.22 2706.7,2461.15 ; 4077.63,2272.66 4077.86,2272.66
EXP_SYNC: EXP0.6 U3.141 | length 1246.1
  Top Layer w8: U3.141@2399.88,2425.08 2612.77,2425.08 2713.2,2324.65 2740.08,2324.65 2773.58,2291.15 2900.22,2291.15 2933.72,2324.65 3229.42,2324.65 3269.42,2284.65 3432.83,2284.65 3522.83,2194.65
FET_PWM1: TP43.1 U3.135 U8.1 | length 1283.7
  Top Layer w8: U3.135@2399.88,2306.97 2605.07,2306.97 2713.9,2198.15 2948.77,2198.15 v2(2983.2,2232.57) ; v2(3020.63,2514.65) 3020.63,2562.07 3108.2,2649.65 3210.63,2649.65 3226.06,2665.08 U8.1@3226.06,2698.43
  Bottom Layer w8: v2(2983.2,2232.57) 2983.2,2287.07 2965.63,2304.65 2965.63,2459.65 v2(3020.63,2514.65)
FET_PWM2: TP44.1 U3.134 U8.3 | length 1359.2
  Top Layer w8: U3.134@2399.88,2287.28 2603.54,2287.28 2707.68,2183.15 2969.13,2183.15 v2(3025.63,2239.65) ; v2(3045.63,2549.65) 3045.63,2565.86 3114.42,2634.65 3249.42,2634.65 3277.24,2662.47 U8.3@3277.24,2698.43
  Bottom Layer w8: v2(3025.63,2239.65) 3025.63,2314.65 3005.63,2334.65 3005.63,2369.65 2995.63,2379.65 3005.63,2389.65 3005.63,2460.56 3044.13,2499.06 3044.13,2518.15 3045.63,2519.65 v2(3045.63,2549.65)
FET_PWM3: TP45.1 U3.133 U8.4 | length 1384.9
  Top Layer w8: U3.133@2399.88,2267.6 2602.02,2267.6 2701.47,2168.15 2989.49,2168.15 v2(3018.56,2197.22) ; v2(3070.63,2514.65) 3070.63,2569.65 3120.63,2619.65 3255.63,2619.65 3302.83,2666.85 U8.4@3302.83,2698.43
  Bottom Layer w8: v2(3018.56,2197.22) 3018.56,2199.34 3049.13,2229.91 3049.13,2426.15 TP45.1@3035.63,2439.65 ; TP45.1@3040.63,2439.65 TP45.1@3050.63,2439.65 3050.63,2474.65 3070.63,2494.65 v2(3070.63,2514.65)
FET_PWM4: TP46.1 U3.132 U8.5 | length 1407.8
  Top Layer w8: U3.132@2399.88,2247.91 2600.49,2247.91 2695.26,2153.15 3007.72,2153.15 3058.86,2204.29 v2(3060.99,2204.29) ; v2(3095.63,2549.65) 3095.63,2573.43 3126.84,2604.65 3265.63,2604.65 3328.43,2667.44 U8.5@3328.43,2698.43
  Bottom Layer w8: v2(3060.99,2204.29) 3094.13,2237.43 3094.13,2548.15 v2(3095.63,2549.65)
FET_PWM5: TP47.1 U3.131 U8.6 | length 1455.5
  Top Layer w8: U3.131@2399.88,2228.23 2399.88,2229.65 2597.54,2229.65 2689.04,2138.15 3030.2,2138.15 v2(3053.91,2161.86) ; v2(3120.63,2514.65) 3120.63,2569.65 3140.63,2589.65 3275.63,2589.65 3354.02,2668.03 U8.6@3354.02,2698.43
  Bottom Layer w8: v2(3053.91,2161.86) 3135.63,2243.58 3135.63,2499.65 v2(3120.63,2514.65)
GND: "Heat Power.2" "Heat Power.4" "Motor Power.2" C1_ES1.2 C1_ES2.2 C1_ES3.2 C2_ES1.2 C2_ES2.2 C2_ES3.2 C3_M1.2 C3_M2.2 C3_M3.2 C3_M4.2 C3_M5.2 C4.1 C5_M1.2 C5_M2.2 C5_M3.2 C5_M4.2 C5_M5.2 C6_M1.2 C6_M2.2 C6_M3.2 C6_M4.2 C6_M5.2 C7.2 C8_M1.2 C8_M2.2 C8_M3.2 C8_M4.2 C8_M5.2 C9.2 C10.2 C11.2 C12_M1.1 C12_M2.1 C12_M3.1 C12_M4.1 C12_M5.1 C13.1 C14_M1.1 C14_M2.1 C14_M3.1 C14_M4.1 C14_M5.1 C17.2 C20.2 C21.2 C22.2 C23.1 C24.2 C25.1 C26.2 C27.1 C28.1 C29.2 C30_TR1.1 C30_TR2.1 C31_TC1.1 C31_TC2.1 C32.1 C33.1 C36.1 C37.1 C38.1 C39.1 C41.1 C42.1 C43.1 C44.1 C45.1 C46.1 C47.1 C48.1 C53.1 C54.1 C55.1 C56.1 C57.1 C60.1 C61.1 C63.1 C64.1 C65.1 C71_M1.1 C71_M2.1 C71_M3.1 C71_M4.1 C71_M5.1 C73.1 C75_M1.1 C75_M2.1 C75_M3.1 C75_M4.1 C75_M5.1 D1.1 D4.1 D5_TR1.1 D5_TR2.1 D6.1 D7.C D8.A D9.C D20_M1.C D20_M2.C D20_M3.C D20_M4.C D20_M5.C D21_M1.C D21_M2.C D21_M3.C D21_M4.C D21_M5.C D22_M1.C D22_M2.C D22_M3.C D22_M4.C D22_M5.C D23_M1.C D23_M2.C D23_M3.C D23_M4.C D23_M5.C DA1.3 DA2.3 DA3.3 EXP0.10 EXP0.11 EXP1.10 EXP1.11 EXP2.10 EXP2.11 JTAG/DEBUG.3 JTAG/DEBUG.5 JTAG/DEBUG.9 MAX1_ES1.2 MAX1_ES2.2 MAX1_ES3.2 MIN1_ES1.2 MIN1_ES2.2 MIN1_ES3.2 P2_TR1.2 P2_TR2.2 Q2.2 Q3.2 Q4.1 Q4.2 Q4.3 Q5.1 Q5.2 Q5.3 Q6.1 Q6.2 Q6.3 Q7.1 Q7.2 Q7.3 R4.2 R9.1 R12.2 R23.1 R32_M1.1 R32_M2.1 R32_M3.1 R32_M4.1 R32_M5.1 R33_M1.1 R33_M2.1 R33_M3.1 R33_M4.1 R33_M5.1 R46.2 R55.2 R59.2 R63.2 R67.2 R71.2 S1.2 U1.5 U1.7 U1.11 U2.2 U2.4 U3.12 U3.33 U3.44 U3.46 U3.54 U3.58 U3.74 U3.106 U3.126 U4_TC1.1 U4_TC2.1 U6.9 U6.15 U7_M1.14 U7_M1.28 U7_M1.29 U7_M2.14 U7_M2.28 U7_M2.29 U7_M3.14 U7_M3.28 U7_M3.29 U7_M4.14 U7_M4.28 U7_M4.29 U7_M5.14 U7_M5.28 U7_M5.29 U8.9 | length 7382.9
  Top Layer w10: C63.1@330,3197.44 331.44,3196 v1(375,3196) ; C75_M1.1@762.48,683.7 v4(762.48,715) ; Q3.2@1036.4,3493.57 1036.4,3431.13 R55.2@1044,3423.53 ; v1(1069.53,2174.65) 1104.53,2174.65 1120.53,2158.65 1173.09,2158.65 1204.53,2127.2 C54.1@1255.75,2127.2 ; v1(1205.63,2414.65) 1248.07,2372.2 C60.1@1304.53,2372.2 ; 1394.53,2279.65 1432.76,2279.65 1460.08,2306.97 U3.46@1569.17,2306.97 1639.37,2306.97 v1(1650.63,2318.23) ; v1@1455.63,1769.65 v1(1455.63,1774.65) ; C75_M2.1@1487.48,683.7 v4(1487.48,715) ; C43.1@1512.09,2739.65 C44.1@1556.97,2739.65 1556.97,2702.2 v1(1569.53,2689.65) ; U3.58@1569.17,2070.75 1615.63,2070.75 ; U3.54@1569.17,2149.49 1629.37,2149.49 1644.53,2164.65 v1(1674.53,2164.65) ; U3.44@1569.17,2346.34 1626.22,2346.34 v1(1644.53,2364.65) ; 1635.24,1664.65 1659.72,1689.13 U3.74@1659.72,1724.29 1659.72,1765.55 1645.63,1779.65 ; v1(1729.25,2454.65) 1699.09,2484.8 U3.33@1699.09,2555 1699.09,2616.53 1685.63,2630 1685.63,2658.94 1721.33,2694.65 1770.63,2694.65 1787.09,2711.1 1787.09,2744.65 1791.72,2749.28 1791.72,2764.65 1792.09,2765.02 C32.1@1792.09,2779.65 ; v1(2055,2645) C47.1@2086.3,2645 2086.3,2628.7 2112.48,2602.52 U3.12@2112.48,2555 ; C38.1@2183.7,2685 2185,2686.3 v1(2185,2720) ; C75_M3.1@2212.48,683.7 v4(2212.48,715) ; C23.1@2240.63,1590.95 C45.1@2280.63,1590.95 ; v1(2260.63,1789.65) 2289.65,1760.63 U3.106@2289.65,1724.29 ; v1@2329.68,2129.8 U3.126@2399.88,2129.8 C39.1@2529.68,2129.8 ; C75_M4.1@2937.48,683.7 v4(2937.48,715) ; C2_ES1.2@3557.56,1680 v1(3595,1680) ; C75_M5.1@3662.48,683.7 v4(3662.48,715) ; DA1.3@3685,1597.6 v1(3685,1685) ; 3745.51,2543.03 v1(3745.51,2600.47) ; v1(3770,1680) C1_ES1.2@3807.91,1680 ; C2_ES3.2@3972.56,1680 v1(4010,1680) ; DA3.3@4100,1602.6 v1(4100,1690) ; U1.5@4184.94,943.83 v1@4207.09,943.83 ; v1(4190,1680) C1_ES3.2@4227.91,1680 ; v1(4210,2330.47) C30_TR2.1@4210,2362.91 4210.98,2363.9 D5_TR2.1@4270,2363.9 ; C2_ES2.2@4387.56,1680 v1(4425,1680) ; DA2.3@4515,1602.6 v1(4515,1690) ; v1(4605,1680) C1_ES2.2@4642.91,1680
  Top Layer w12: U1.7@4165.26,1132.8 4165.26,1157.49 4173.65,1165.88 4204.13,1165.88 4268.59,1101.42 4268.59,1050.36 4287,1031.95
  Top Layer w15: C12_M1.1@632.48,1123.7 v4(756.18,1123.7) ; U6.9@1160.75,2549.65 v1(1240.63,2549.65) ; U6.15@1160.75,2849.65 1270.63,2849.65 1278.19,2857.2 v1@1343.07,2857.2 ; C28.1@1254.53,2262.2 1304.53,2262.2 1331.5,2289.17 1385,2289.17 1394.53,2279.65 ; R23.1@1276.97,2421.61 v1(1276.97,2520.87) ; C37.1@1354.53,2162.2 1404.53,2162.2 1411.97,2169.65 v1(1445.63,2169.65) ; C12_M2.1@1357.48,1123.7 v4(1481.18,1123.7) ; C27.1@1444.53,1732.2 1444.53,1758.54 v1@1455.63,1769.65 ; 1457.09,1734.65 1580.63,1734.65 1625.63,1779.65 1645.63,1779.65 ; v1(1520.63,1464.65) 1520.63,1494.65 1555.63,1529.65 C64.1@1578.07,1529.65 1550.63,1557.09 1550.63,1602.2 C65.1@1578.07,1629.65 1613.07,1664.65 1635.24,1664.65 ; 1615.63,2070.75 v1(1649.53,2104.65) ; C12_M3.1@2082.48,1123.7 v4(2206.18,1123.7) ; C39.1@2529.68,2129.8 2547.09,2147.2 C46.1@2565.63,2147.2 ; C12_M4.1@2807.48,1123.7 v4(2931.18,1123.7) ; JTAG/DEBUG.3@2870.55,2809.65 v1(2945.63,2809.65) ; JTAG/DEBUG.5@2870.55,2859.65 v1(2945.63,2859.65) ; JTAG/DEBUG.9@2870.55,2959.65 v1(2945.63,2959.65) ; v1(3057.07,2943.2) C20.2@3112.63,2943.2 C17.2@3162.63,2943.2 ; v1(3067.63,2679.65) C26.2@3160.07,2679.65 ; U8.9@3405.2,2920.87 3434.41,2920.87 v1(3434.63,2920.65) ; C12_M5.1@3532.48,1123.7 v4(3656.18,1123.7) ; v2(3625,2325.47) U4_TC2.1@3709.49,2325.47 ; D7.C@3859.89,870 v1(3917,870) ; v1(3953.57,869.31) C10.2@4004.57,869.31 ; v1(3966.57,1053.31) 3966.72,1053.46 C9.2@4027.57,1053.46 ; v1(3995.51,2270.47) 3995.51,2296.5 U4_TC1.1@4024.49,2325.47 ; C9.2@4021.57,1059.46 v1(4021.57,1106.31) C21.2@4021.57,1162.31 ; C31_TC1.1@4062.56,2525.47 v1(4062.56,2563.43) ; v1@4207.09,943.83 4227.57,964.31 C22.2@4244.57,964.31 ; R12.2@4363.35,897.32 v1(4399.57,897.31)
  Top Layer w25: C11.2@3949.57,1251.09 3949.57,1266.31 v1(3972.57,1289.31)
  Top Layer w35: v1(235,370) D20_M1.C@235,436.26 ; v1(248.74,551.26) D21_M1.C@315,551.26 ; D23_M1.C@722.48,551.26 v1(788.74,551.26) ; v1(807.48,370) D22_M1.C@807.48,436.26 ; v1(960,370) D20_M2.C@960,436.26 ; v1(973.74,551.26) D21_M2.C@1040,551.26 ; D23_M2.C@1447.48,551.26 v1(1513.74,551.26) ; v1(1532.48,370) D22_M2.C@1532.48,436.26 ; v1(1685,370) D20_M3.C@1685,436.26 ; v1(1698.74,551.26) D21_M3.C@1765,551.26 ; D23_M3.C@2172.48,551.26 v1(2238.74,551.26) ; v1(2257.48,370) D22_M3.C@2257.48,436.26 ; v1(2410,370) D20_M4.C@2410,436.26 ; v1(2423.74,551.26) D21_M4.C@2490,551.26 ; D23_M4.C@2897.48,551.26 v1(2963.74,551.26) ; v1(2982.48,370) D22_M4.C@2982.48,436.26 ; v1(3135,370) D20_M5.C@3135,436.26 ; v1(3148.74,551.26) D21_M5.C@3215,551.26 ; D23_M5.C@3622.48,551.26 v1(3688.74,551.26) ; v1(3707.48,370) D22_M5.C@3707.48,436.26
  Top Layer w40: C24.2@3859.57,1493.87 C24.2@3860,1494.29
  other v1: 4213.57,950.31 2334.53,2129.65 4540,2300.47 1345.63,2854.65 1069,3034 1139,3034 1209,3034 1279,3034 1469,3034 1539,3034 1609,3034 1679,3034 1869,3034 1939,3034 2009,3034 2079,3034 2274,3034 2344,3034 2414,3034 2484,3034 1938.5,3083.19 2008.5,3083.19 2078.5,3083.19 2273.5,3083.19 2343.5,3083.19 2413.5,3083.19 2483.5,3083.19 1069,3084 1139,3084 1209,3084 1279,3084 1467.5,3083.61 1537.5,3083.61 1607.5,3083.61 1677.5,3083.61 1869,3084
  other v3: 432.13,851.95 475.43,851.95 518.74,851.95 562.05,851.95 605.35,851.95 1157.13,851.95 1200.43,851.95 1243.74,851.95 1287.05,851.95 1330.35,851.95 1882.13,851.95 1925.43,851.95 1968.74,851.95 2012.05,851.95 2055.35,851.95 2607.13,851.95 2650.43,851.95 2693.74,851.95 2737.05,851.95 2780.35,851.95 3332.13,851.95 3375.43,851.95 3418.74,851.95 3462.05,851.95 3505.35,851.95 432.13,895.26 475.43,895.26 518.74,895.26 562.05,895.26 605.35,895.26 1157.13,895.26 1200.43,895.26 1243.74,895.26 1287.05,895.26 1330.35,895.26 1882.13,895.26 1925.43,895.26 1968.74,895.26 2012.05,895.26 2055.35,895.26 2607.13,895.26 2650.43,895.26 2693.74,895.26 2737.05,895.26 2780.35,895.26 3332.13,895.26 3375.43,895.26 3418.74,895.26 3462.05,895.26 3505.35,895.26 432.13,938.57 475.43,938.57 518.74,938.57 562.05,938.57 605.35,938.57 1157.13,938.57 1200.43,938.57 1243.74,938.57 1287.05,938.57 1330.35,938.57 1882.13,938.57 1925.43,938.57 1968.74,938.57 2012.05,938.57 2055.35,938.57 2607.13,938.57 2650.43,938.57 2693.74,938.57 2737.05,938.57 2780.35,938.57 3332.13,938.57 3375.43,938.57 3418.74,938.57 3462.05,938.57 3505.35,938.57
  other v5: 4106.2,998.94 4145.57,998.94 4184.94,998.94 4106.2,1038.31 4145.57,1038.31 4184.94,1038.31 4106.2,1077.68 4145.57,1077.68 4184.94,1077.68
  other v6: 4299,1110 4364,1110
GPIO0_EXP: EXP0.7 U3.140 | length 1238
  Top Layer w8: U3.140@2399.88,2405.39 2611.24,2405.39 2706.99,2309.65 2733.87,2309.65 2767.37,2276.15 2906.43,2276.15 2939.93,2309.65 3223.2,2309.65 3263.2,2269.65 3426.61,2269.65 3516.61,2179.65
GPIO1_EXP: EXP0.8 U3.139 | length 1229.8
  Top Layer w8: U3.139@2399.88,2385.71 2609.71,2385.71 2700.78,2294.65 2727.65,2294.65 2761.15,2261.15 2912.64,2261.15 2946.14,2294.65 3216.99,2294.65 3256.99,2254.65 3420.4,2254.65 3510.4,2164.65
GPIO2_EXP: EXP0.14 U3.21 | length 1297.2
  Top Layer w8: U3.21@1935.32,2555 1935.32,2703.26 2126.7,2894.65 2496.7,2894.65 2590.63,2800.71 2590.63,2598.43 2712.92,2476.15 ; 4071.42,2287.66 4071.65,2287.66
GPIO3_EXP: EXP0.13 U3.22 | length 1330.2
  Top Layer w8: U3.22@1915.63,2555 1915.63,2704.79 2120.48,2909.65 2502.91,2909.65 2605.63,2806.92 2605.63,2604.65 2719.13,2491.15 ; 4065.2,2302.66 4065.43,2302.66
GPIO4_EXP: EXP2.5 U3.59 | length 467.8
  Top Layer w8: v2(1475.63,2051.06) U3.59@1569.17,2051.06
  Bottom Layer w8: 1174.42,1874.65 1299.21,1874.65 v2(1475.63,2051.06)
GPIO5_EXP: EXP2.16 U3.68 | length 383.8
  Top Layer w8: 1211.99,1809.65 1381.99,1809.65 1421.99,1849.65 1442.74,1849.65 1466.99,1873.9 U3.68@1569.17,1873.9
I2C_SCL: EXP0.3 EXP2.3 U3.70 | length 3318.7
  Top Layer w8: 1218.2,1794.65 1388.2,1794.65 1428.09,1834.53 U3.70@1569.17,1834.53 1690.51,1834.53 1717.03,1861.04 1717.03,1961.04 v2(1760.63,2004.65) ; v2(2394.53,1749.65) 2475.63,1749.65 2489.13,1736.15 2678.03,1736.15 v2(2689.53,1724.65) ; v2(2779.53,2339.65) 2798.03,2321.15 2887.79,2321.15 2922.79,2356.15 3255.9,2356.15 3297.4,2314.65 3445.25,2314.65 3535.25,2224.65
  Bottom Layer w8: v2(1760.63,2004.65) 1783.2,2004.65 1793.2,1994.65 2248.2,1994.65 2335.63,1907.22 2335.63,1808.54 v2(2394.53,1749.65) ; v2(2689.53,1724.65) 2728.2,1724.65 2804.53,1800.97 2804.53,2290.75 2779.53,2315.75 v2(2779.53,2339.65)
I2C_SDA: EXP0.18 EXP2.18 U3.9 | length 3226.7
  Top Layer w8: v2(2119.88,2339.65) 2119.88,2363.3 2190.53,2433.94 2190.53,2491.11 2171.54,2510.1 U3.9@2171.54,2555 2171.54,2626.65 v2(2264.53,2719.65) ; v2(2330.63,2824.65) 2481.84,2824.65 2530.63,2775.86 2530.63,2573.58 2688.06,2416.15 3449.82,2416.15
  Bottom Layer w8: 1179.63,1858.65 1370.3,1858.65 1500.63,1988.98 1500.63,2077.07 1648.2,2224.65 2004.88,2224.65 v2(2119.88,2339.65) ; v2(2264.53,2719.65) 2312.76,2719.65 2345.63,2752.51 2345.63,2809.65 v2(2330.63,2824.65)
INPUT_GND: C58.1 C59.1 DA4.3 U6.2 U6.8 USB.4 USB.5 USB.6 | length 337.2
  Top Layer w22: v1(500.63,2624.65) DA4.3@573.03,2624.65 ; v1(610.63,2849.65) U6.2@800.51,2849.65 ; v1(725.63,2549.65) U6.8@800.51,2549.65
MAX_ES1: C2_ES1.1 DA1.2 MAX1_ES1.1 R3_ES1.1 TP10_ES1.1 U3.76 | length 1142.1
  Top Layer w8: v2(1680,1590) 1680,1651.44 1699.09,1670.54 U3.76@1699.09,1724.29 ; 3500.94,1630 3502.44,1631.5 3502.44,1680 3542.44,1720 ; MAX1_ES1.1@3585,1875 3585,1762.56 3542.44,1720 ; 3640,1500 3640,1664.8 DA1.2@3647.6,1672.4 3600,1720 3542.44,1720
  Bottom Layer w8: v2(1680,1590) 1700,1570 1893.64,1570 1948.64,1515 ; MAX1_ES1.1@3585,1875 TP10_ES1.1@3585,1995
MAX_ES2: C2_ES2.1 DA2.2 MAX1_ES2.1 R3_ES2.1 TP10_ES2.1 U3.95 | length 861.9
  Top Layer w8: U3.95@2073.11,1724.29 2073.11,1646.06 2079.53,1639.65 v2(2079.53,1619.65) ; 4330.94,1630 4332.44,1631.5 4332.44,1680 4367.44,1715 4440,1715 ; MAX1_ES2.1@4415,1875 4415,1740 DA2.2@4477.6,1677.4 4475,1674.8 v2(4475,1595)
  Bottom Layer w8: v2(2079.53,1619.65) 2079.53,1515.75 2100.63,1494.65 ; MAX1_ES2.1@4415,1875 TP10_ES2.1@4415,1995 ; 4460,1580 v2(4475,1595)
MAX_ES3: C2_ES3.1 DA3.2 MAX1_ES3.1 R3_ES3.1 TP10_ES3.1 U3.78 | length 1086.5
  Top Layer w8: v2(1720,1630) 1722.12,1632.12 1722.12,1651.14 1738.46,1667.48 U3.78@1738.46,1724.29 ; 3915.94,1630 3917.44,1631.5 3917.44,1680 3924.95,1680 3945.81,1700.86 3945.81,1702.27 3952.25,1708.72 3953.67,1708.72 3965.39,1720.43 4020.43,1720.43 4045,1745 4045,1830 MAX1_ES3.1@4000,1875 ; 4020,1720 DA3.2@4062.6,1677.4 4060,1674.8 4060,1505
  Bottom Layer w8: v2(1720,1630) 1750,1600 1906.07,1600 1961.07,1545 ; MAX1_ES3.1@4000,1875 TP10_ES3.1@4000,1995
MCCDZ: EXP2.14 U3.72 | length 358.9
  Top Layer w8: 1230.63,1764.65 1400.63,1764.65 1440.51,1804.53 1505.75,1804.53 1515.12,1795.16 U3.72@1569.17,1795.16
MCCK: EXP2.15 U3.71 | length 363.2
  Top Layer w8: 1224.42,1779.65 1394.42,1779.65 1434.3,1819.53 1515.75,1819.53 1520.43,1814.84 U3.71@1569.17,1814.84
MCDZ0: EXP2.8 U3.107 | length 1109.6
  Top Layer w8: 1609.27,1434.65 1732.5,1434.65 1747.13,1449.27 1747.13,1449.38 1760.9,1463.15 1761,1463.15 1762.5,1464.65 v2(1795.63,1464.65) ; U3.107@2309.33,1724.29 2309.33,1660.94 2325.63,1644.65 2325.63,1409.65 v2(2335.63,1399.65)
  Bottom Layer w8: v2(1795.63,1464.65) 1805.63,1474.65 1888.06,1474.65 1943.06,1419.65 2315.63,1419.65 v2(2335.63,1399.65)
MCDZ1: EXP2.7 U3.81 | length 382.5
  Top Layer w8: 1603.06,1449.65 1649.65,1449.65 1775.63,1575.63 1775.63,1641.01 1797.52,1662.9 U3.81@1797.52,1724.29
MCDZ2: EXP2.6 U3.80 | length 361.9
  Top Layer w8: 1596.84,1464.65 1643.43,1464.65 1760.63,1581.84 1760.63,1647.22 1777.83,1664.42 U3.80@1777.83,1724.29
MCDZ3: EXP2.13 U3.79 | length 341.3
  Top Layer w8: 1590.63,1479.65 1637.22,1479.65 1745.63,1588.06 1745.63,1653.43 1758.15,1665.95 U3.79@1758.15,1724.29
MIN_ES1: C1_ES1.1 DA1.1 MIN1_ES1.1 R2_ES1.1 TP9_ES1.1 U3.77 | length 1361.3
  Top Layer w8: v2(1714.95,1595.05) 1696.5,1613.5 1696.5,1646.73 1718.78,1669.01 U3.77@1718.78,1724.29 ; 3720,1510 3720,1660 3715,1665 DA1.1@3722.4,1672.4 3770,1720 3823.03,1720 ; MIN1_ES1.1@3785,2115 3850,2050 3850,1746.97 3823.03,1720 ; 3865,1630 3863.03,1631.97 3863.03,1680 3823.03,1720
  Bottom Layer w8: v2(1714.95,1595.05) 1729.95,1595.05 1740,1585 1899.85,1585 1954.85,1530 ; MIN1_ES1.1@3785,2115 TP9_ES1.1@3785,2235
MIN_ES2: C1_ES2.1 DA2.1 MIN1_ES2.1 R2_ES2.1 TP9_ES2.1 U3.100 | length 1262
  Top Layer w8: U3.100@2171.54,1724.29 2171.54,1677.64 v2(2184.53,1664.65) ; v2(4555,1595) 4555,1674.8 DA2.1@4552.4,1677.4 4585,1710 4668.03,1710 ; MIN1_ES2.1@4615,2115 4675,2055 4675,1716.97 4668.03,1710 ; 4700,1630 4700,1678.03 4698.03,1680 4668.03,1710
  Bottom Layer w8: v2(2184.53,1664.65) 2195.63,1653.54 2195.63,1604.65 2290.63,1509.65 ; 4435,1595 4458.5,1618.5 4531.5,1618.5 v2(4555,1595) ; MIN1_ES2.1@4615,2115 TP9_ES2.1@4615,2235
MIN_ES3: C1_ES3.1 DA3.1 MIN1_ES3.1 R2_ES3.1 TP9_ES3.1 U3.88 | length 964.3
  Top Layer w8: v2(1925.63,1624.65) 1925.63,1668.43 1935.32,1678.12 U3.88@1935.32,1724.29 ; 4155,1610 4137.4,1627.6 DA3.1@4137.4,1677.4 4180,1720 4260,1720 ; MIN1_ES3.1@4200,2115 4270,2045 4270,1729.91 4260.04,1719.96 4283.03,1696.97 4283.03,1680 4283.03,1631.97
  Bottom Layer w8: MIN1_ES3.1@4200,2115 TP9_ES3.1@4200,2235
MISO: EXP0.19 EXP2.19 TP7.1 U3.108 U4_TC1.7 U4_TC2.7 | length 4294.5
  Top Layer w8: 1615.48,1419.65 1755.63,1419.65 1770.63,1434.65 v2(1770.63,1439.65) ; U3.108@2329.02,1724.29 2329.02,1662.47 2350.63,1640.86 v2(2350.63,1584.65) 2350.63,1417.88 2359.13,1409.38 2359.13,1389.91 2345.63,1376.41 v2(2345.63,1359.65) ; v2(2865.63,2374.65) 2892.13,2401.15 3443.61,2401.15 ; U4_TC2.7@3520.51,2375.47 v2(3595,2375.47) ; U4_TC1.7@3835.51,2375.47 3925,2375.47 3945,2355.47 3945,2205.47
  Bottom Layer w8: v2(1770.63,1439.65) 1810.63,1439.65 1830.63,1459.65 1881.84,1459.65 1936.84,1404.65 2270.63,1404.65 2315.63,1359.65 v2(2345.63,1359.65) ; v2(2350.63,1584.65) 2410.63,1524.65 2600.63,1524.65 2755.63,1679.65 2755.63,1704.65 2839.53,1788.54 2839.53,2300.54 2864.53,2325.54 2864.53,2373.54 v2(2865.63,2374.65) 2865.63,2434.65 3010.63,2579.65 3286.63,2579.65 TP7.1@3321.63,2544.65 v2(3450.63,2544.65) ; v2(3595,2375.47) 3620,2350.47 3820,2350.47
MOD0E1: TP37_M1.1 U3.84 U7_M1.24 | length 797.2
  Top Layer w8: U7_M1.24@454.76,1008.46 v4(454.76,1068.9) ; 1640.34,1359.65 1816.29,1359.65 1856.57,1399.93 U3.84@1856.57,1724.29
  Bottom Layer w8: v4(454.76,1068.9) 472.48,1086.61 472.48,1136.52 465.74,1143.26 TP37_M1.1@465.74,1238.26
MOD0E2: TP37_M2.1 U3.91 U7_M2.24 | length 612.2
  Top Layer w8: U7_M2.24@1179.76,1008.46 v4(1179.76,1068.9) ; 1994.37,1352.03 U3.91@1994.37,1724.29
  Bottom Layer w8: v4(1179.76,1068.9) 1197.48,1086.61 1197.48,1136.52 1190.74,1143.26 TP37_M2.1@1190.74,1238.26
MOD0E3: TP37_M3.1 U3.98 U7_M3.24 | length 609.6
  Top Layer w8: U7_M3.24@1904.76,1008.46 v4(1904.76,1068.9) ; U3.98@2132.17,1724.29 2132.17,1669.32 2135.63,1665.86 2135.63,1356.01
  Bottom Layer w8: v4(1904.76,1068.9) 1922.48,1086.61 1922.48,1136.52 1915.74,1143.26 TP37_M3.1@1915.74,1238.26
MOD0E4: TP37_M4.1 U3.113 U7_M4.24 | length 1122.5
  Top Layer w8: U3.113@2399.88,1873.9 2710.46,1873.9 2855.63,1728.73 2855.63,1362.07 ; U7_M4.24@2629.76,1008.46 v4(2629.76,1068.9)
  Bottom Layer w8: v4(2629.76,1068.9) 2647.48,1086.61 2647.48,1136.52 2640.74,1143.26 TP37_M4.1@2640.74,1238.26
MOD0E5: TP37_M5.1 U3.120 U7_M5.24 | length 1254.1
  Top Layer w8: U3.120@2399.88,2011.69 2453.58,2011.69 2455.63,2009.65 2500.63,2009.65 2537.01,1973.27 2738.37,1973.27 2945.63,1766.01 2945.63,1399.35 ; U7_M5.24@3354.76,1008.46 v4(3354.76,1068.9)
  Bottom Layer w8: v4(3354.76,1068.9) 3372.48,1086.61 3372.48,1136.52 3365.74,1143.26 TP37_M5.1@3365.74,1238.26
MOD1E1: TP36_M1.1 U3.83 U7_M1.25 | length 713.1
  Top Layer w8: U7_M1.25@429.17,1008.46 v4(429.17,1088.31) ; 1634.12,1374.65 1810.08,1374.65 1840.63,1405.2 1840.63,1675.86 1836.89,1679.6 U3.83@1836.89,1724.29
  Bottom Layer w8: TP36_M1.1@420.74,1178.26 420.74,1143.26 429.17,1134.83 v4(429.17,1088.31)
MOD1E2: TP36_M2.1 U3.90 U7_M2.25 | length 544
  Top Layer w8: U7_M2.25@1154.17,1008.46 v4(1154.17,1088.31) ; 1974.68,1353.55 U3.90@1974.68,1724.29
  Bottom Layer w8: TP36_M2.1@1145.74,1178.26 1145.74,1143.26 1154.17,1134.83 v4(1154.17,1088.31)
MOD1E3: TP36_M3.1 U3.97 U7_M3.25 | length 551.2
  Top Layer w8: U7_M3.25@1879.17,1008.46 v4(1879.17,1088.31) ; U3.97@2112.48,1724.29 2112.48,1667.8 2120.63,1659.65 2120.63,1349.79
  Bottom Layer w8: TP36_M3.1@1870.74,1178.26 1870.74,1143.26 1879.17,1134.83 v4(1879.17,1088.31)
MOD1E4: TP36_M4.1 U3.117 U7_M4.25 | length 1138.8
  Top Layer w8: U3.117@2399.88,1952.64 v2(2477.64,1952.64) ; v2(2509.53,1839.65) 2530.63,1839.65 2549.13,1858.15 2705,1858.15 2840.63,1722.51 2840.63,1355.86 ; U7_M4.25@2604.17,1008.46 v4(2604.17,1088.31)
  Bottom Layer w8: v2(2477.64,1952.64) 2495.63,1934.65 2495.63,1853.54 v2(2509.53,1839.65) ; TP36_M4.1@2595.74,1178.26 2595.74,1143.26 2604.17,1134.83 v4(2604.17,1088.31)
MOD1E5: TP36_M5.1 U3.119 U7_M5.25 | length 1166.9
  Top Layer w8: U3.119@2399.88,1992.01 2496.89,1992.01 2530.63,1958.27 2732.16,1958.27 2930.63,1759.79 2930.63,1393.14 ; U7_M5.25@3329.17,1008.46 v4(3329.17,1088.31)
  Bottom Layer w8: TP36_M5.1@3320.74,1178.26 3320.74,1143.26 3329.17,1134.83 v4(3329.17,1088.31)
MOD2E1: TP35_M1.1 U3.82 U7_M1.26 | length 764.4
  Top Layer w8: U7_M1.26@403.58,1008.46 v4(403.58,1068.9) ; 1627.91,1389.65 1803.86,1389.65 1825.63,1411.41 1825.63,1669.65 1817.2,1678.07 U3.82@1817.2,1724.29
  Bottom Layer w8: TP35_M1.1@375.74,1238.26 375.74,1096.74 v4(403.58,1068.9)
MOD2E2: TP35_M2.1 U3.89 U7_M2.26 | length 610.5
  Top Layer w8: U7_M2.26@1128.58,1008.46 v4(1128.58,1068.9) ; 1955,1355.08 U3.89@1955,1724.29
  Bottom Layer w8: TP35_M2.1@1100.74,1238.26 1100.74,1096.74 v4(1128.58,1068.9)
MOD2E3: TP35_M3.1 U3.96 U7_M3.26 | length 623.7
  Top Layer w8: U7_M3.26@1853.58,1008.46 v4(1853.58,1068.9) ; U3.96@2092.8,1724.29 2092.8,1659.99 2103.03,1649.76 2103.03,1346.18
  Bottom Layer w8: TP35_M3.1@1825.74,1238.26 1825.74,1096.74 v4(1853.58,1068.9)
MOD2E4: TP35_M4.1 U3.143 U7_M4.26 | length 1664.3
  Top Layer w8: U3.143@2399.88,2464.45 2449.33,2464.45 2454.53,2469.65 v2(2484.53,2469.65) ; U7_M4.26@2578.58,1008.46 v4(2578.58,1068.9) ; v2(2579.53,1834.65) 2707.28,1834.65 2825.63,1716.3 2825.63,1349.65
  Bottom Layer w8: v2(2484.53,2469.65) 2529.53,2424.65 2529.53,1884.65 v2(2579.53,1834.65) ; TP35_M4.1@2550.74,1238.26 2550.74,1096.74 v4(2578.58,1068.9)
MOD2E5: TP35_M5.1 U3.118 U7_M5.26 | length 1217.5
  Top Layer w8: U3.118@2399.88,1972.32 2464.09,1972.32 2467.9,1976.14 2489.14,1976.14 2522.01,1943.27 2725.94,1943.27 2915.63,1753.58 2915.63,1386.92 ; U7_M5.26@3303.58,1008.46 v4(3303.58,1068.9)
  Bottom Layer w8: TP35_M5.1@3275.74,1238.26 3275.74,1096.74 v4(3303.58,1068.9)
MODE0_EXP1: EXP1.1 U3.2 | length 1801.7
  Top Layer w8: U3.2@2309.33,2555 2309.33,2505.94 v2(2325.63,2489.65)
  Bottom Layer w8: 930.63,1919.65 1280.57,1919.65 1415.63,2054.7 1415.63,2184.65 1485.63,2254.65 1992.46,2254.65 2074.42,2336.61 2074.42,2348.63 2103.94,2378.15 2104.13,2378.15 2125.63,2399.65 2125.63,2451.42 2163.86,2489.65 2310.63,2489.65
MODE0_EXP2: EXP1.20 U3.27 | length 1399
  Top Layer w8: v2(1765.63,1924.65) 1775.63,1924.65 1817.2,1966.22 U3.27@1817.2,2555
  Bottom Layer w8: 1120.63,1684.65 1405.63,1684.65 1580.63,1859.65 1683.86,1859.65 1709.13,1884.91 1709.13,1896.93 1736.84,1924.65 v2@1755.63,1924.65
MODE1_EXP1: EXP1.2 U3.5 | length 1731.4
  Top Layer w8: v2(2230.63,2374.65) 2250.53,2394.54 2250.53,2554.75 U3.5@2250.28,2555
  Bottom Layer w8: 924.42,1904.65 1286.79,1904.65 1437.13,2054.99 1437.13,2102.36 1470.02,2135.25 1470.02,2147.27 1485.9,2163.15 1564.13,2163.15 1640.63,2239.65 1998.67,2239.65 2089.65,2330.63 2089.65,2342.65 2110.15,2363.15 2110.34,2363.15 2121.84,2374.65 v2(2230.63,2374.65)